# EAGLE board emonDCduo v0.1 (EAGLE 7.5.0)
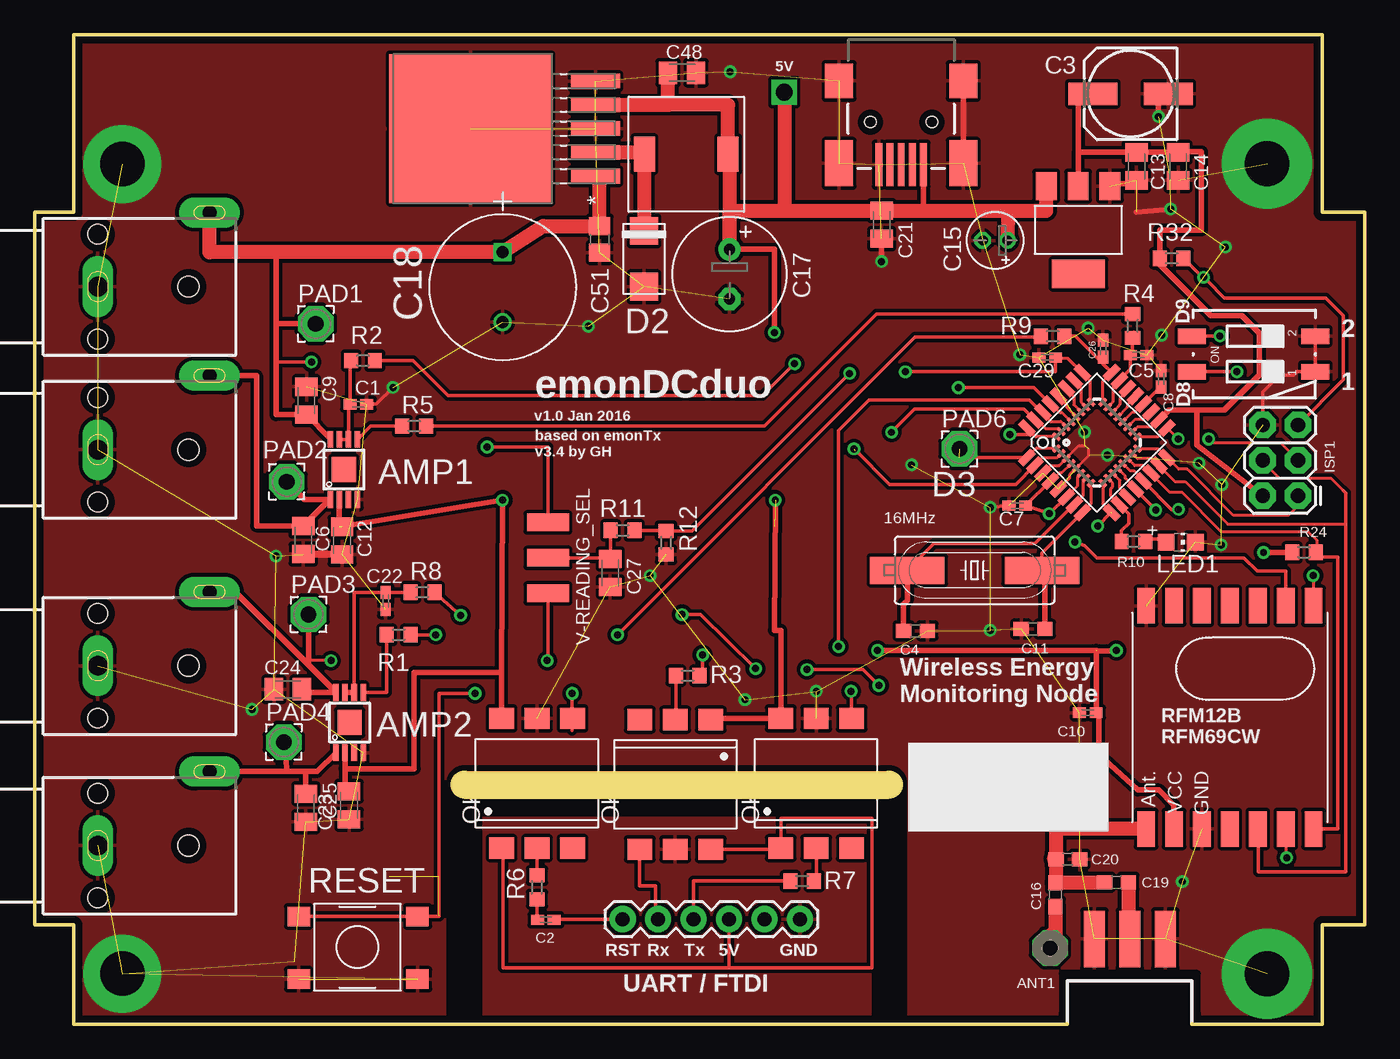
[diagram p0: board, top side]
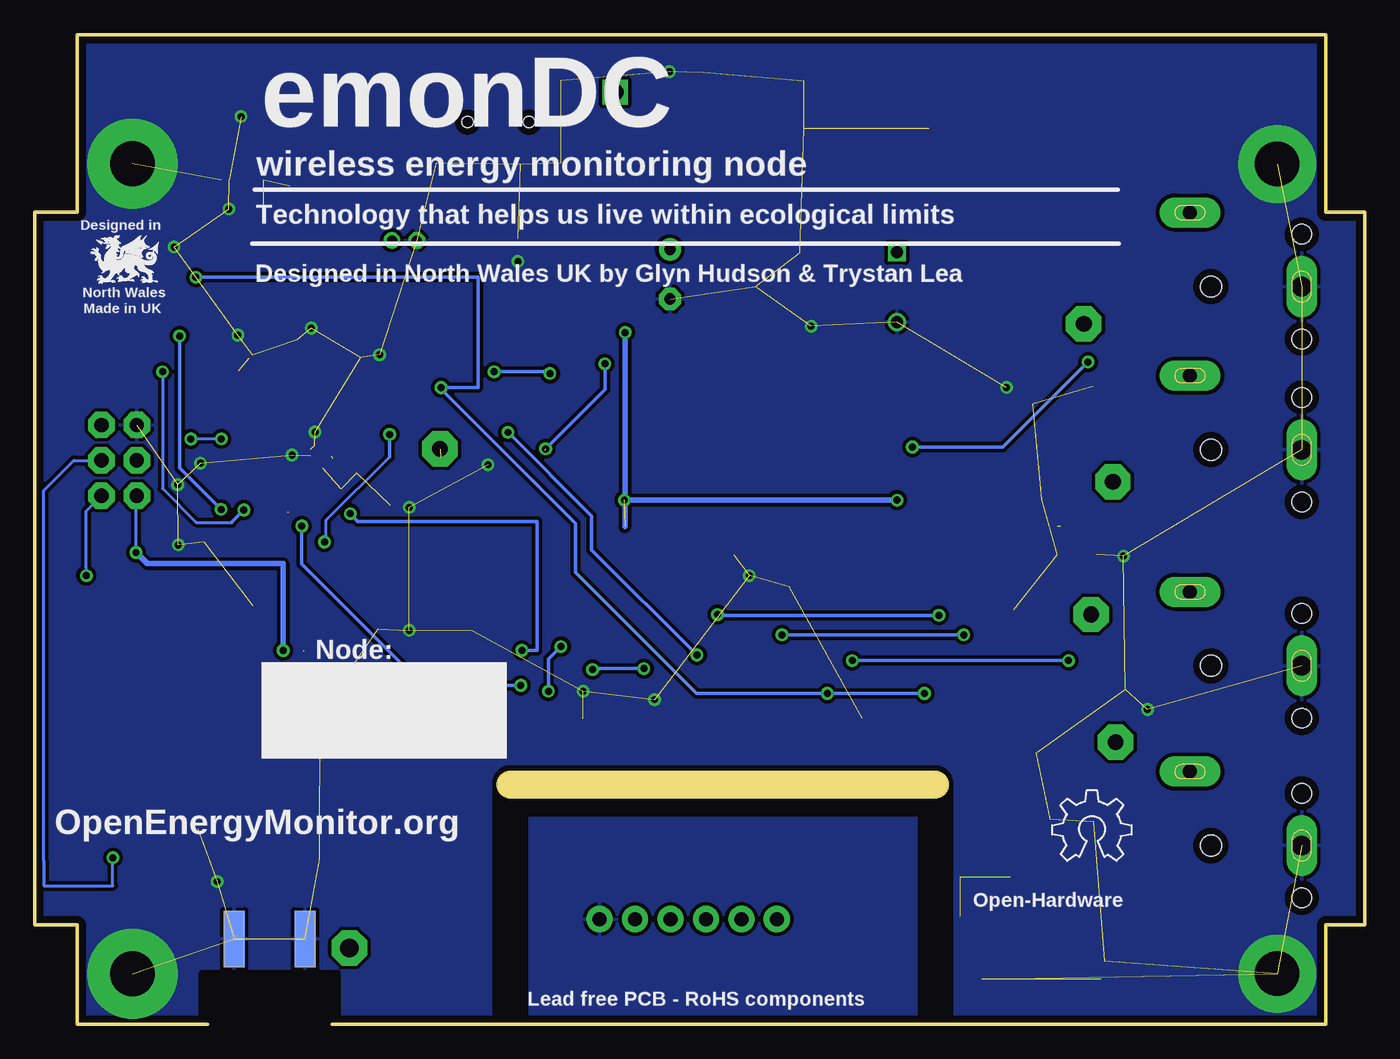
[diagram p1: board, bottom side, seen from below]

Size 95.25 x 70.87 mm. Coordinates in mm from the lower left corner, seen from the top.
Outline: 2.79,0 2.79,7.11 0,7.11 0,58.17 2.79,58.17 2.79,70.87 92.2,70.87 92.2,58.17 95.25,58.17 95.25,7.11 92.2,7.11 92.2,0
Outline: 92.21,0 82.87,0
Outline: 73.97,0 2.79,0
Copper layers (1*16): Top 0.0178mm / dielectric 59mil / Bottom 0.0178mm
Design rules "SSC-EAGLE-2Lyr_v1.0.0.3": minimum track width 6mil, minimum drill 14mil, track to track 6mil, track to pad 6mil, pad to pad 6mil, via to via 6mil, smd to smd 6mil, copper to edge 20mil, drill to drill 16mil, minimum pad ring 8mil, minimum via ring 8mil, stop-mask expansion 3mil, vias tented up to drill 0mil, thermal gap 10mil
Net classes: 2 thin_power: width 0.254 mm
tRestrict: area 73.6,0.8 to 83.3,3.6; 3 lines
bRestrict: area 73.6,0.8 to 83.3,3.6; 3 lines
Milling: 1 lines

## Footprints (pad centres in the part's own frame; a part is rotated, then mirrored left to right if it is on the bottom)
SOT223 = smd 1.499 x 2.007: 1 -2.261,-3.15; 2 0.025,-3.15; 3 2.311,-3.15 | smd 3.81 x 2.007: 4 0,3.15
TO-263 = smd 1.041 x 3.505: 1 -3.404,-8.788; 2 -1.702,-8.788; 3 0,-8.788; 4 1.702,-8.788; 5 3.404,-8.788 | smd 10.668 x 11.659: 6 0,0.152
PAD-01 = drill 1.321 pad 2.54 octagon: 1 0,0
MLF32 = smd 0.7 x 0.3: 1 -2.35,1.75; 2 -2.35,1.25; 3 -2.35,0.75; 4 -2.35,0.25; 5 -2.35,-0.25; 6 -2.35,-0.75; 7 -2.35,-1.25; 8 -2.35,-1.75; 17 2.35,-1.75; 18 2.35,-1.25; 19 2.35,-0.75; 20 2.35,-0.25; 21 2.35,0.25; 22 2.35,0.75; 23 2.35,1.25; 24 2.35,1.75 | smd 0.3 x 0.7: 9 -1.75,-2.35; 10 -1.25,-2.35; 11 -0.75,-2.35; 12 -0.25,-2.35; 13 0.25,-2.35; 14 0.75,-2.35; 15 1.25,-2.35; 16 1.75,-2.35; 25 1.75,2.35; 26 1.25,2.35; 27 0.75,2.35; 28 0.25,2.35; 29 -0.25,2.35; 30 -0.75,2.35; 31 -1.25,2.35; 32 -1.75,2.35
C0402K = smd 0.925 x 0.74: 1 -0.6,0; 2 0.6,0
153CLV-0605 = smd 3.5 x 1.6: + 2.7,0; - -2.7,0
C0603 = smd 1.1 x 1: 1 -0.85,0; 2 0.85,0
C0805K = smd 1.3 x 1.6: 1 -1,0; 2 1,0
E1,8-4 = drill 0.711 pad 1.168: + -0.889,0 | drill 0.711 pad 1.168 octagon: - 0.889,0
E3,5-8 = drill 0.813 pad 1.6: + -1.778,0 | drill 0.813 pad 1.6 octagon: - 1.778,0
CAPPR500-1000X2000 = drill 0.864 square: 1 -5.004,0 | drill 0.864: 2 0,0
C0805 = smd 1.3 x 1.5: 1 -0.95,0; 2 0.95,0
DO-214 = smd 2 x 2: P$1 -2,0; P$2 2,0
SRR0603-331KL = smd 1.5 x 2.5: P$1 -3,0; P$2 3,0
2X3 = drill 1.016 pad 1.88 octagon: 1 0,0; 2 0,2.54; 3 2.54,0; 4 2.54,2.54; 5 5.08,0; 6 5.08,2.54
SMA-EDGE = smd 1.524 x 4.064: GND@0 0,0; GND@1 5.08,0; SIG 2.54,0 | smd 1.524 x 4.064 bottom: GND@2 0,0; GND@3 5.08,0
FTDI_BASIC = drill 1.016 pad 1.88: CTS 10.16,0; DTR 0,0; GND 12.7,0; RXI 2.54,0; TXO 5.08,0; VCC 7.62,0
CHIP-LED0805 = smd 1.2 x 1.2: A 0,-1.05; C 0,1.05
S-PDSO-G08 = smd 0.4 x 1.2: 1 -0.975,-2.157; 2 -0.325,-2.157; 3 0.325,-2.157; 4 0.975,-2.157; 5 0.975,2.157; 6 0.325,2.157; 7 -0.325,2.157; 8 -0.975,2.157 | smd 1.73 x 1.78: TH 0,0
DIL6-SMD = smd 1.78 x 1.52: 1 -2.54,-4.645; 2 0,-4.645; 3 2.54,-4.645; 4 2.54,4.645; 5 0,4.645; 6 -2.54,4.645
2,54/1,1 = drill 1.118 pad 2.54 octagon: 1 0,0
HC49UP = smd 5.334 x 1.93: 1 -4.826,0; 2 4.826,0
R0603 = smd 1 x 1.1: 1 -0.85,0; 2 0.85,0
RFM12B = smd 2.54 x 1.27: ANT 8,-6; FFS -8,2; GND 8,-2; IRQ -8,4; P$8 -8,0; P$9 -8,-2; P$10 -8,-4; P$12 -8,-6; P$16 8,0; SCK 8,4; SDI 8,2; SDO -8,6; SEL 8,6; VDD 8,-4
DIP_SWITCH_SMT = smd 1.1 x 2: 1 -1.27,-4.215; 2 1.27,-4.215; 3 1.27,4.615; 4 -1.27,4.615
TQFP32-08 = smd 1.27 x 0.559: 1 -4.293,2.8; 2 -4.293,2; 3 -4.293,1.2; 4 -4.293,0.4; 5 -4.293,-0.4; 6 -4.293,-1.2; 7 -4.293,-2; 8 -4.293,-2.8; 17 4.293,-2.8; 18 4.293,-2; 19 4.293,-1.2; 20 4.293,-0.4; 21 4.293,0.4; 22 4.293,1.2; 23 4.293,2; 24 4.293,2.8 | smd 0.559 x 1.27: 9 -2.8,-4.293; 10 -2,-4.293; 11 -1.2,-4.293; 12 -0.4,-4.293; 13 0.4,-4.293; 14 1.2,-4.293; 15 2,-4.293; 16 2.8,-4.293; 25 2.8,4.293; 26 2,4.293; 27 1.2,4.293; 28 0.4,4.293; 29 -0.4,4.293; 30 -1.2,4.293; 31 -2,4.293; 32 -2.8,4.293
SWITCH_TACT_MULTICOMP = smd 1.6 x 1.4: P$1 -1.1,5.3; P$2 7.4,5.3; P$3 -1.1,0.8; P$4 7.4,0.8
USB-MINIB-CISECO = smd 3.1 x 0.5: D+ 8.25,0; D- 8.25,0.8; GND 8.25,-1.6; ID 8.25,-0.8; VBUS 8.25,1.6 | smd 2.5 x 2: MTN1 2.25,4.45; MTN3 2.25,-4.45 | smd 3.3 x 2: MTN2 8.15,4.45; MTN4 8.15,-4.45 | hole 0.8: 5.2,2.2; 5.2,-2.2
1X03_SMD_RA_FEMALE_NOWRITE = smd 1.25 x 3: 1 -2.54,3.415; 2 0,3.415; 3 2.54,3.415
WBTOR1 = drill 1.4 pad 2.2 long: S 0,-4 | drill 1 pad 2.2 long: T 5.3,-12 | hole 1.4: -3.75,-4; 3.75,-4 | hole 1.5: 0,-10.5

## Placement (x,y rotation side)
3.3V_REG  REG1117  [SOT223]  74.76,56.9 180 top
5V_REG  TL2575HV  [TO-263]  31.36,64.15 90 top
ANT1  [PAD-01]  72.72,5.46 0 top
ATMEGA328  ATMEGA168MLF  [MLF32]  76.07,41.66 45 top
C1  0.22uF 6.3V  [C0402K]  23.17,44.41 0 top
C2  100nF  [C0402K]  36.59,7.47 180 top
C3  100uF  [153CLV-0605]  78.49,66.65 180 top
C4  22pF  [C0603]  63.08,28.17 0 top
C5  100nF  [C0402K]  79.06,47.93 180 top
C6  100nF 100V  [C0805K]  19.23,34.68 270 top
C7  100nF  [C0402K]  70.37,37.15 180 top
C8  100nF  [C0402K]  80.67,46.23 90 top
C9  100nF 100V  [C0805K]  19.45,44.66 270 top
C10  100nF  [C0402K]  75.42,22.31 180 top
C11  22pF  [C0603]  71.5,28.31 180 top
C12  100nF 100V  [C0805K]  22,34.63 90 top
C13  0.1uF  [C0805K]  78.91,61.45 270 top
C14  0.1uF  [C0805K]  81.89,61.45 270 top
C15  10uF 35v  [E1,8-4]  68.79,56.14 180 top
C16  22pF  [C0603]  73.1,9.27 270 top
C17  470uF 16V  [E3,5-8]  49.76,53.72 270 top
C18  330UF 63V  [CAPPR500-1000X2000]  33.51,50.29 270 top
C19  22pF  [C0603]  77.47,10.16 0 top
C20  tune  [C0603]  73.99,11.81 0 top
C21  0.1uF  [C0805K]  60.66,57.27 270 top
C22  0.22uF 6.3V  [C0402K]  25.13,30.31 270 top
C23  100nF 100V  [C0805K]  19.41,15.5 270 top
C24  100nF 100V  [C0805K]  18.12,23.98 0 top
C25  100nF 100V  [C0805K]  22.5,15.68 90 top
C26  100nF  [C0402K]  76.52,48.39 270 top
C27  100nF 100V  [C0805K]  41.21,32.32 270 top
C29  100nF  [C0402K]  72.52,47.75 180 top
C48  0.1uF  [C0805K]  46.35,68.15 0 top
C51  0.1uF  [C0805]  40.45,56.22 270 top
D2  MBRA130LT3G  [DO-214]  43.63,54.82 270 top
I1  [SRR0603-331KL]  46.66,62.32 0 top
ISP1  M20-9980346  [2X3]  90.49,37.85 90 top
J$1  SMA_EDGE  [SMA-EDGE]  80.98,6.1 180 top
JP-UART  2211S-06G  [FTDI_BASIC]  42.1,7.52 0 top
LED1  Red 1.85V  [CHIP-LED0805]  82.08,34.52 270 top
LMP2  LMP8481SMCLMP8481  [S-PDSO-G08]  22.54,21.6 0 top
LMP8481  LMP8481SMCLMP8481  [S-PDSO-G08]  22.13,39.73 0 top
LOGO1  OSHW_LOGO_6MILX0200-NT  [OSHW_6X200_NOTEXT]  22.37,11.68 0 bottom
OK1  H11L1MS  [DIL6-SMD]  55.97,17.25 0 top
OK2  H11L1MS  [DIL6-SMD]  45.87,17.17 180 top
OK3  H11L1MS  [DIL6-SMD]  35.97,17.25 0 top
PAD1  WIREPAD2,54/1,1  [2,54/1,1]  20.11,50.17 0 top
PAD2  WIREPAD2,54/1,1  [2,54/1,1]  18.03,38.86 0 top
PAD3  WIREPAD2,54/1,1  [2,54/1,1]  19.6,29.35 0 top
PAD4  WIREPAD2,54/1,1  [2,54/1,1]  17.83,20.2 0 top
PAD6  WIREPAD2,54/1,1  [2,54/1,1]  66.23,41.21 0 top
Q1  16Mhz XT49M-2016M  [HC49UP]  67.31,32.51 180 top
R1  1K  [R0603]  26.06,27.89 0 top
R2  3.9K  [R0603]  23.5,47.53 0 top
R3  348R  [R0603]  46.76,24.96 0 top
R4  9K1  [R0603]  78.62,50.01 90 top
R5  1K  [R0603]  27.17,42.84 0 top
R6  348R  [R0603]  35.97,9.8 90 top
R7  348R  [R0603]  54.97,10.25 0 top
R8  3.9K  [R0603]  27.77,30.94 0 top
R9  9K1  [R0603]  72.9,49.28 180 top
R10  1K  [R0603]  78.69,34.57 180 top
R11  120K  [R0603]  42.1,35.37 180 top
R12  9K1  [R0603]  45.21,34.48 90 top
R24  120K  [R0603]  90.92,33.8 180 top
R32  10K  [R0603]  81.42,54.86 180 top
RF  RFM12B  [RFM12B]  85.6,21.97 270 top
S3  A6S-2104-PH  [DIP_SWITCH_SMT]  87.5,48.01 90 top
U1_TQFP  ATMEGA328P  [TQFP32-08]  76.07,41.66 45 top
U$1  MC32882  [SWITCH_TACT_MULTICOMP]  20,2.41 0 top
USB  MUSB-05-S-B-SM-A  [USB-MINIB-CISECO]  62.05,69.82 270 top
V-READING_SEL  M20-9990346  [1X03_SMD_RA_FEMALE_NOWRITE]  33.34,33.4 270 top
X1  PSG01540  [WBTOR1]  0.51,52.83 90 top
X2  PSG01540  [WBTOR1]  0.51,41.15 90 top
X3  PSG01540  [WBTOR1]  0.51,12.79 90 top
X4  PSG01540  [WBTOR1]  0.51,25.67 90 top

## Library data of the parts
3.3V_REG = burr-brown; MF: TEXAS INSTRUMENTS; MPN: REG1117; OC_FARNELL: 1097566; OC_NEWARK: 14P6981
5V_REG = TL2575HV; MF: TEXAS INSTRUMENTS; MPN: LM2575HVS-15/NOPB; OC_FARNELL: 2492609
ANT1 = discrete; OC_FARNELL: unknown
ATMEGA328 = SparkFun-DigitalIC; MF: ATMEL; MPN: ATMEGA168-20MU; OC_FARNELL: 1455105
C1 C22 = rcl; MF: AVX; MPN: 04026D224KAT2A; OC_FARNELL: 1327659
C2 C5 C7 C8 C10 C26 C29 = rcl; MF: WALSIN; MPN: 0402X104K100CT; OC_FARNELL: 2496809
C3 = resistor; MF: NICHICON; MPN: UWX0J101MCL1GB; OC_FARNELL: 1823603
C4 C11 = resistor; MF: YAGEO (PHYCOMP); MPN: CC0402JRNPO9BN470; OC_FARNELL: 3019202
C6 C9 C12 C23-C25 C27 = rcl; MF: AVX; MPN: 08051C104K4Z2A; OC_FARNELL: 1833851
C13 C14 C21 C48 = rcl; MF: WALSIN; MPN: 0805B104K160CT; OC_FARNELL: 2496942
C15 = rcl; MF: AVX; MPN: TAJD106K035RNJ; OC_FARNELL: 498956
C16 C19 = rcl; MF: YAGEO (PHYCOMP); MPN: CC0402JRNPO9BN470; OC_FARNELL: 3019202
C17 = rcl; MF: RUBYCON; MPN: 16YXF470MEFC10X12.5; OC_FARNELL: 1144616
C18 = Panasonic-ECA_01; MF: PANASONIC ELECTRONIC COMPONENTS; MPN: ECA1JHG331; OC_FARNELL: unknown; OC_NEWARK: 96K9187; PACKAGE: Radial Lead-TH; SUPPLIER: PANASONIC; TOLERANCE: ±20 %; VOLTAGERATING: 63V
C20 = rcl; OC_FARNELL: unknown
C51 = resistor; MF: WALSIN; MPN: 0805B104K160CT; OC_FARNELL: 2496942
D2 = CASE 403D Diode; MF: ON SEMICONDUCTOR; MPN: MBRA130LT3G; OC_FARNELL: 9555978
I1 = SRR0603-331KL; INDUCTANCE: 330uH; MF: BOURNS; MPN: SRR0603-331KL; OC_FARNELL: 2333890
ISP1 = SparkFun; MF: HARWIN; MPN: M20-9980346; OC_FARNELL: 1022231
J$1 = SparkFun-Connectors; OC_FARNELL: unknown
JP-UART = SparkFun; MF: MULTICOMP; MPN: 2211S-06G; OC_FARNELL: 1593415
LED1 = adafruit; MF: ROHM; MPN: SML-211UTT86K; OC_FARNELL: 1685056
LMP2 LMP8481 = lmp8481b; MF: TEXAS INSTRUMENTS; MPN: LMP8481MME-S/NOPB; OC_FARNELL: 2322044
LOGO1 = ohw-logo; OC_FARNELL: unknown
OK1-OK3 = optocoupler; OC_FARNELL: unknown; OC_NEWARK: unknown
PAD1-PAD4 PAD6 = wirepad
Q1 = adafruit; MF: VISHAY; MPN: XT49M-2016M; OC_FARNELL: 1469641; OC_NEWARK: unknown
R1 R5 = adafruit; MF: MULTICOMP; MPN: MC0063W060351K; OC_FARNELL: 9331697
R2 R8 = adafruit; MF: VISHAY; MPN: CRCW06039K09FKEA; OC_FARNELL: 1152155
R3 R6 R7 = adafruit; MF: MULTICOMP; MPN: MC0063W06031348R; OC_FARNELL: 1170742
R4 R9 R11 R12 = adafruit; MF: MULTICOMP; MPN: MC01W080559K1; OC_FARNELL: 9334955
R10 = rcl; MF: MULTICOMP; MPN: MC0063W060351K; OC_FARNELL: 9331697
R24 = rcl; MF: YAGEO (PHYCOMP); MPN: RC0603FR-07120KL; OC_FARNELL: 9238735
R32 = adafruit; MF: MULTICOMP; MPN: MC0063W0603510K; OC_FARNELL: 9331700
RF = JeeParts; OC_FARNELL: unknown
S3 = OpenEnergyMonitor; MF: OMRON ELECTRONIC COMPONENTS; MPN: A6S2104H; OC_FARNELL: 1960894
U1_TQFP = SparkFun-DigitalIC; MF: ATMEL; MPN: ATMEGA328-AU; OC_FARNELL: 1972086; PROD_ID: IC-09069
U$1 = multicomp tact switch
USB = Ciseco USB miniB; MF: MOLEX; MPN: 67503-1020; OC_FARNELL: 1125348
V-READING_SEL = SparkFun-Connectors; MF: HARWIN; MPN: M20-9990346; OC_FARNELL: 1022249
X1-X4 = con-lumberg; MF: PRO SIGNAL; MPN: PSG01540; OC_FARNELL: 1280698; OC_NEWARK: 98K2588

## Nets
3.3V: 3.3V_REG.2 ATMEGA328.4 ATMEGA328.6 ATMEGA328.18 C3.+ C7.1 C10.1 C13.1 C14.1 ISP1.2 R24.2 R32.2 RF.VDD U1_TQFP.4 U1_TQFP.6 U1_TQFP.18
5V [power]: 3.3V_REG.3 5V_REG.4 C12.2 C15.+ C17.+ C21.1 C25.2 C48.1 I1.P$2 LMP2.2 LMP8481.2 OK1.6 OK2.1 OK3.6 USB.VBUS
+5V-ISO [power]: JP-UART.VCC OK1.1 OK2.6 OK3.1
A6: ATMEGA328.19 U1_TQFP.19
A7: ATMEGA328.22 U1_TQFP.22
ACD2: ATMEGA328.25 C29.1 R11.1 R12.2 U1_TQFP.25
ADC0A: R4.2 R5.2
ADC1A: R1.2 R9.2
ADC1AYEA: ATMEGA328.24 C26.2 R9.1 U1_TQFP.24
ADC4: ATMEGA328.26 U1_TQFP.26
ADC5: ATMEGA328.28 U1_TQFP.28
AGND [thin_power]: ATMEGA328.21 U1_TQFP.21
D0/RX: ATMEGA328.30 OK1.4 U1_TQFP.30
D1/TX: ATMEGA328.31 R3.2 U1_TQFP.31
D2: ATMEGA328.32 RF.IRQ U1_TQFP.32
D3: ATMEGA328.1 PAD6.1 U1_TQFP.1
D4/PWM0: ATMEGA328.2 R2.2 U1_TQFP.2
D5/PWM1: ATMEGA328.9 R8.2 U1_TQFP.9
D6: ATMEGA328.10 R10.2 U1_TQFP.10
D7: ATMEGA328.11 U1_TQFP.11
D8: ATMEGA328.12 S3.4 U1_TQFP.12
D9: ATMEGA328.13 S3.3 U1_TQFP.13
D10: ATMEGA328.14 R24.1 RF.SEL U1_TQFP.14
D11/MOSI: ATMEGA328.15 ISP1.4 RF.SDI U1_TQFP.15
D12/MISO: ATMEGA328.16 ISP1.1 RF.SDO U1_TQFP.16
D13/SCK: ATMEGA328.17 ISP1.3 RF.SCK U1_TQFP.17
DIG1: C16.1 C19.1 C20.1 RF.ANT
GND [thin_power]: 3.3V_REG.1 5V_REG.3 5V_REG.5 5V_REG.6 ATMEGA328.3 ATMEGA328.5 C1.2 C3.- C4.2 C5.1 C6.2 C7.2 C8.2 C9.1 C10.2 C11.2 C12.1 C13.2 C14.2 C15.- C17.- C18.2 C20.2 C21.2 C22.2 C23.2 C24.1 C25.1 C26.1 C27.2 C29.2 C48.2 C51.2 D2.P$2 ISP1.6 J$1.GND@0 J$1.GND@1 J$1.GND@2 J$1.GND@3 LED1.C LMP2.4 LMP8481.4 OK1.5 OK3.5 R12.1 RF.GND RF.P$12 S3.1 S3.2 U1_TQFP.3 U1_TQFP.5 U$1.P$3 U$1.P$4 USB.GND USB.MTN1 USB.MTN2 USB.MTN3 USB.MTN4 X1.S X2.S X3.S X4.S
GND-ISO [thin_power]: JP-UART.GND OK2.5
IND: 5V_REG.2 D2.P$1 I1.P$1
INPUTLINE1: 5V_REG.1 C9.2 C18.1 C51.1 LMP8481.8 PAD1.1 V-READING_SEL.1 X1.T
INPUTLINE2: C24.2 LMP2.8 PAD3.1 V-READING_SEL.3 X4.T
N$1: ATMEGA328.7 C4.1 Q1.2 U1_TQFP.7
N$2: ATMEGA328.23 C5.2 R4.1 U1_TQFP.23
N$3: LMP2.5 R1.1
N$5: ATMEGA328.27 U1_TQFP.27
N$6: LMP8481.5 R5.1
N$9: ATMEGA328.8 C11.1 Q1.1 U1_TQFP.8
N$10: C2.1 JP-UART.DTR
N$11: ANT1.1 C16.2
N$13: OK1.2 R7.2
N$15: OK2.2 R3.1
N$17: OK3.2 R6.2
N$20: ATMEGA328.20 C8.1 U1_TQFP.20
N$24: C19.2 J$1.SIG
N$41: LED1.A R10.1
NETDF: C22.1 LMP2.6 LMP2.7 R8.1
NETDG: C1.1 LMP8481.6 LMP8481.7 R2.1
RESET: ATMEGA328.29 ISP1.5 OK3.4 R32.1 U1_TQFP.29 U$1.P$1 U$1.P$2
RESET-ISO: C2.2 R6.1
RX-ISO: JP-UART.RXI OK2.4
TOLOAD1: C6.1 LMP8481.1 PAD2.1 X2.T
TOLOAD2: C23.1 LMP2.1 PAD4.1 X3.T
TX-ISO: JP-UART.TXO R7.1
VSEL: C27.1 R11.2 V-READING_SEL.2

## Tracks (layer width: path | path; a pad name or v marks a point on that pad's centre or on a via)
3.3V  (via drill 0.5)  (2 unrouted)
  Top 0.203: 88.03,33.8 v88.01,33.78 | U1_TQFP.4 72.81,38.9 73.41,39.5 73.56,39.5 ATMEGA328.4 | ATMEGA328.18 78.63,42.43 78.99,42.8 80.04,42.8 U1_TQFP.18 | ATMEGA328.6 74.68,39.19 74.68,38.56 U1_TQFP.6
  Top 0.254: U1_TQFP.4 C7.1 v72.66,36.57 U1_TQFP.6 | R32.2 80.57,54.39 | 81.22,44 81.22,43.97 | v77.47,26.77 77.47,26.75
  Top 0.406: RF.VDD 81.6,15.68 80.52,16.76 78.99,16.76 76.2,19.3 76.2,22.12 C10.1 76.02,26.77 v60.37,26.77 | R24.2 88.03,33.8 | 73.89,37.82 U1_TQFP.6 | 80.57,54.39 84.22,50.75 86.47,50.75 87.72,49.5 87.72,46.5 85.22,44 83.22,44 | 83.22,44 81.22,44 | 81.22,43.97 U1_TQFP.18 | 3.3V_REG.2 74.73,62.45 | 74.73,62.45 C13.1 C14.1 81.39,62.5 83.56,62.5 83.57,56.9 80.57,56.9 R32.2 | C3.+ 74.73,66.65 74.73,62.45 | ISP1.2 83.22,41.5 83.22,44 | 77.47,26.75 76,26.75
  Bottom 0.203: v88.01,33.78 88.01,37.78 ISP1.2
  Bottom 0.254: v72.66,36.57 72.14,36.02 59.27,36.02 59.27,26.77 v60.37,26.77
  Bottom 0.406: 87.99,33.78 87.2,33 77.47,33 v77.47,26.77
5V  (via drill 0.5, 1.2)  (2 unrouted)
  Top 0.406: USB.VBUS 63.65,58.27 64.01,58.27 | C17.+ 52.97,55.5 v52.97,49.56 | v53.03,37.54 52.97,28.21 53.43,28.21 OK1.6 48.48,21.88 | LMP8481.2 21.81,35.63 | C12.2 v33.49,37.54 33.43,25.21 | OK3.6 33.43,25.21 | C25.2 22.21,16.96 LMP2.2 22.21,18.29 27.18,18.29 27.18,25.21 33.43,25.21
  Top 0.5: 48.48,21.88 OK2.1
  Top 1.016: 5V_REG.4 45.36,65.85 | 45.36,65.85 C48.1 | 45.36,65.85 49.66,65.85 I1.P$2 49.76,62.32 C17.+ 49.76,58.27 53.68,58.27 | 53.68,58.27 C21.1 64.01,58.27 69.7,58.27 | 69.7,58.27 C15.+ | 69.7,58.27 72.44,58.27 3.3V_REG.3 | v53.68,66.76 53.68,58.27
  Bottom 0.406: v52.97,49.56 52.98,35.64 | v53.03,37.54 v33.49,37.54
+5V-ISO
  Top 0.254: JP-UART.VCC 49.72,4.02 | 49.72,4.02 33.53,4.02 33.53,12.61 OK3.1 | 49.72,4.02 59.94,4.02 59.94,14.73 53.43,14.73 OK1.1 53.43,12.54 OK2.6
A6
  Top 0.203: U1_TQFP.19 79.91,43.84 79.38,43.31 78.78,43.31 ATMEGA328.19
A7
  Top 0.203: U1_TQFP.22 78.26,45.37 77.72,44.83 77.71,44.37 77.61,44.24 77.6,44.24 ATMEGA328.22
ACD2  (via drill 0.5)
  Top 0.203: U1_TQFP.25 75.02,46.65 75.56,46.1 75.56,44.64 ATMEGA328.25
  Top 0.254: R11.1 45.21,35.37 R12.2 47.08,35.33 v58.36,46.61 | U1_TQFP.25 74,47.69 C29.1 73.12,46.74 v62.36,46.74
  Bottom 0.254: v62.36,46.74 58.48,46.74 v58.36,46.61
ADC0A
  Top 0.254: R5.2 52.26,42.84 60.28,50.86 R4.2
ADC1A  (via drill 0.5)
  Top 0.254: v41.73,27.89 63.06,49.21 71.98,49.21 | v28.71,27.89 R1.2
  Top 0.406: 71.98,49.21 R9.2
  Bottom 0.254: v41.73,27.89 v28.71,27.89
ADC1AYEA
  Top 0.203: ATMEGA328.24 76.5,46.04 U1_TQFP.24
  Top 0.254: R9.1 74.52,49.28 U1_TQFP.24 76.52,47.28 C26.2
ADC4
  Top 0.203: U1_TQFP.26 74.45,46.07 74.93,45.59 74.93,44.57 ATMEGA328.26
ADC5
  Top 0.203: U1_TQFP.28 73.32,44.92 73.91,44.32 73.91,44.17 ATMEGA328.28
AGND
  Top 0.203: U1_TQFP.21 78.78,44.94 78.3,44.41 78.23,44.17 ATMEGA328.21
D0/RX  (via drill 0.5)
  Top 0.203: U1_TQFP.30 72.19,43.76 72.77,43.18 73.49,43.18 ATMEGA328.30
  Top 0.254: 72.77,43.18 71.26,44.7 59.75,44.7 57.57,42.52 v57.57,27.05 | v58.47,23.85 58.51,23.81 OK1.4
  Bottom 0.254: v57.57,27.05 58.47,26.15 v58.47,23.85
D1/TX  (via drill 0.5)
  Top 0.203: U1_TQFP.31 71.78,43.28 72.39,42.67 73.29,42.67 ATMEGA328.31
  Top 0.254: v61.37,42.4 63.02,44.05 70.86,44.05 U1_TQFP.31 71.54,43.33 | v47.83,26.44 47.83,25.18 R3.2
  Bottom 0.254: v61.37,42.4 55.37,36.4 55.37,33.98 v47.83,26.44
D2  (via drill 0.5)
  Top 0.203: ATMEGA328.32 71.69,42.08 U1_TQFP.32
  Top 0.254: RF.IRQ 89.6,32.45 87.57,32.45 86.61,33.4 76.07,33.4 75.18,34.29 v74.51,34.54 | 71.69,42.08 71.52,42.25 v69.84,42.25
  Bottom 0.203: 74.3,34.54 v74.51,34.54 74.42,34.42 74.42,36.07 69.85,40.64
  Bottom 0.254: v69.84,42.25 69.85,41.87 69.85,40.64
D3  (1 unrouted)
  Top 0.203: U1_TQFP.1 71.08,40.6 71.76,41.28 73.13,41.28 ATMEGA328.1
  Top 0.254: U1_TQFP.1 66.21,40.6
D4/PWM0  (via drill 0.5)  (1 unrouted)
  Top 0.203: U1_TQFP.2 71.62,40.08 72.14,40.59 73.24,40.59 ATMEGA328.2
  Top 0.254: U1_TQFP.2 70.26,38.67 61.21,38.67 58.8,41.09 58.74,41.09 | v54.42,47.31 52.13,45.02 29.59,45.02 27.08,47.53 R2.2
  Bottom 0.254: v58.67,41.21 54.42,45.47 v54.42,47.31
D5/PWM1  (via drill 0.5)  (1 unrouted)
  Top 0.203: ATMEGA328.9 76.5,37.27 U1_TQFP.9
  Top 0.254: v30.49,29.29 R8.2 | v76.14,35.69 77.09,36.64 | v60.45,24.26 59.31,25.4 v55.31,25.4 | v51.62,25.46 47.69,29.34 v46.36,29.34
  Bottom 0.254: v76.14,35.69 76.14,32.96 67.44,24.26 v60.45,24.26 | v55.31,25.4 55.25,25.46 v51.62,25.46 | v46.36,29.34 46.41,29.29 v30.49,29.29
D6
  Top 0.203: U1_TQFP.10 77.69,37.24 77.09,37.85 77.09,38.35 77.22,38.48 77.22,38.75 ATMEGA328.10
  Top 0.254: U1_TQFP.10 78.37,36.53 78.37,35.87 77.84,35.35 R10.2
D7
  Top 0.203: U1_TQFP.11 78.26,37.82 77.72,38.35 77.72,38.94 ATMEGA328.11
D8  (via drill 0.5)
  Top 0.203: U1_TQFP.12 78.83,38.4 78.11,39.12 78.11,39.27 ATMEGA328.12
  Top 0.254: S3.4 v86.11,46.74 | U1_TQFP.12 78.83,38.29 v80.29,36.83
  Bottom 0.203: v86.11,46.74 86.11,38.35 83.69,35.94 81.15,35.94
  Bottom 0.254: v80.29,36.83 81.15,35.97 81.15,35.94
D9  (via drill 0.5)
  Top 0.203: U1_TQFP.13 79.39,38.97 78.74,39.62 78.46,39.62 ATMEGA328.13
  Top 0.254: S3.3 82.91,49.3 v84.89,49.3 | v81.92,36.88 81.41,36.88 U1_TQFP.13
  Bottom 0.254: v81.92,36.88 84.89,39.85 v84.89,49.3
D10
  Top 0.203: 91.77,33.45 R24.1 91.82,33.85 91.82,34.67 91.19,35.31 84.96,35.31 82.17,38.1 81.28,38.1 79.96,39.42 U1_TQFP.14 79.91,39.47 79.38,40.01 78.78,40.01 ATMEGA328.14
  Top 0.254: RF.SEL 93.34,13.97 93.34,33.45 91.77,33.45
D11/MOSI
  Top 0.203: ISP1.4 87.95,40.32 89.15,39.12 92.84,39.12 93.73,38.23 | 87.59,13.32 RF.SDI | ATMEGA328.15 78.98,40.51 80.01,40.51 80.49,40.04 U1_TQFP.15 80.52,40 81.66,38.86 82.4,38.86 85.45,35.81 93.9,35.81
  Top 0.254: 87.59,13.32 87.63,13.32 87.63,10.92 93.9,10.92 93.9,35.81 93.9,38.05 93.73,38.23
D12/MISO  (via drill 0.5)
  Top 0.203: RF.SDO 91.6,32.1 v91.57,32.13 | ISP1.1 90.49,37.15 89.79,36.45 85.85,36.45 82.55,39.75 81.94,39.75 U1_TQFP.16 80.46,41.23 ATMEGA328.16
  Bottom 0.203: v91.57,32.13 91.57,36.77 ISP1.1
D13/SCK  (via drill 0.5)
  Top 0.203: RF.SCK 89.6,12.23 v89.66,11.92 | v81.89,41.92 81.11,42.71 U1_TQFP.17 80.46,42.08 ATMEGA328.17 | v84.08,41.92 84.2,41.66 84.14,41.67 89.22,41.66 ISP1.3
  Bottom 0.203: ISP1.3 92.46,40.39 94.62,38.23 94.62,11.68 94.62,9.91 89.66,9.91 v89.66,11.92 | v81.89,41.92 v84.08,41.92
DIG1
  Top 1.016: RF.ANT 73.14,13.97 C20.1 73.14,10.12 C16.1 73.1,10.16 C19.1
  Top 1.143: C20.1 arc-90 73.07,11.88
GND  (via drill 0.5, 3.2 pad 5.59, 3.2 pad 6.45)  (85 unrouted)
  Top 0.203: 74,40.66 74.79,41.45 75.21,41.45 | 74.61,39.85 75.49,40.73 75.49,41.19
  Top 0.254: ISP1.6 87.95,45.28 89.15,46.48 90.17,46.48 90.42,46.74 S3.1 S3.2 | 79.92,47.7 C5.1 | C7.2 v68.43,37.02 | C1.2 24.45,44.41 v25.65,45.61
  Top 0.406: USB.MTN1 USB.MTN2 | C21.2 v60.66,54.63 | C3.- 80.48,66.65 v80.48,65.02 | 78.91,58.16 v81.36,58.39 | 81.34,60.45 C14.2
  Top 0.5: C12.1 19.23,33.63 C6.2
  other vias: 76.84,40.77 75.18,42.42 55.97,23.85 6.27,61.62 39.65,50 80.72,49.35 68.44,28.21 88.26,61.64 50.86,23.24 82.19,10.21 49.81,68.23 17.27,33.53 84.98,34.34 83.39,40.19 85.03,38.65 85.28,55.68 6.27,3.61 88.26,3.61 15.55,22.55 75.45,49.86 62.8,40.07 70.56,47.96 44.07,32.13
  pour Bottom (isolate 0.254): 3.05,70.61 3.05,57.91 0.25,57.91 0.25,7.37 3.05,7.37 3.05,0.25 91.95,0.25 91.95,7.37 95,7.37 95,57.91 91.95,57.91 91.95,70.61
  pour Top (isolate 0.254): 3.05,70.61 3.05,57.91 0.25,57.91 0.25,7.37 3.05,7.37 3.05,0.25 91.95,0.25 91.95,7.37 95,7.37 95,57.91 91.95,57.91 91.95,70.61
GND-ISO
  pour Top (isolate 0.254): 31.75,14.73 60.2,14.73 60.2,0.25 31.75,0.25
  pour Bottom (isolate 0.254): 31.74,14.72 60.07,14.74 60.2,0.31 31.75,0.31
IND
  Top 1.016: 43.41,62.6 I1.P$1 | 5V_REG.2 43.66,62.45 I1.P$1 | I1.P$1 43.63,62.32 D2.P$1
INPUTLINE1  (via drill 0.5)
  Top 0.254: V-READING_SEL.1 36.75,41.34 v32.39,41.34 | v19.81,47.43 17.27,47.43
  Top 0.406: LMP8481.8 21.16,41.95 C9.2 17.27,43.66 17.27,47.43 17.27,48.01 17.27,50.17 | 17.27,50.17 17.27,55.3 | PAD1.1 17.27,50.17
  Top 1.016: 5V_REG.1 40.45,60.75 C51.1 36.4,57.18 C18.1 17.27,55.3 12.51,55.3 X1.T
  Bottom 0.254: v32.39,41.34 25.91,41.34 v19.81,47.43
INPUTLINE2  (via drill 0.5)
  Top 0.254: V-READING_SEL.3 36.75,25.97 | v21.21,26.04 19.79,26.1 19.6,25.91
  Top 0.406: X4.T 14.36,30.97 19.6,25.72 | 19.6,25.72 LMP2.8 19.06,23.76 C24.2 | PAD3.1 19.6,25.91 19.6,25.72 | 36.75,25.97 v36.7,26.04
  Bottom 0.254: v36.7,26.04 v21.21,26.04
N$1
  Top 0.203: ATMEGA328.7 75.08,38.89 75.08,37.84 U1_TQFP.7
  Top 0.254: U1_TQFP.7 74.42,37.21 71.63,34.42 64.39,34.42 Q1.2
  Top 0.406: Q1.2 62.48,30.35 62.23,30.1 62.23,29.25 C4.1
N$2
  Top 0.203: U1_TQFP.23 77.69,46.07 77.22,45.59 77.22,44.57 ATMEGA328.23
  Top 0.254: 78.72,49.57 R4.1 78.62,48.09 C5.2 78.46,46.92 77.69,46.15 U1_TQFP.23
N$3
  Top 0.254: R1.1 25.21,23.76 LMP2.5
N$5
  Top 0.203: U1_TQFP.27 73.89,45.49 74.42,44.96 74.42,44.37 ATMEGA328.27
N$6
  Top 0.254: LMP8481.5 24.06,42.84 R5.1
N$8
  Top 0.203: 72.52,39.78 72.77,40.03 73.37,40.03 73.83,40.49 73.85,40.49
N$9
  Top 0.203: ATMEGA328.8 75.65,37.27 U1_TQFP.8
  Top 0.254: Q1.1 72.14,33.76 U1_TQFP.8
  Top 0.406: C11.1 72.35,32.3 Q1.1
N$10
  Top 0.254: C2.1 37.19,7.52 JP-UART.DTR
N$11
  Top 1.016: C16.2 73.1,5.46 ANT1.1
  Top 1.143: 72.85,6.35 arc-90 ANT1.1
N$13
  Top 0.254: OK1.2 55.97,10.25 R7.2
N$15
  Top 0.254: R3.1 45.91,21.78 OK2.2
N$17
  Top 0.254: OK3.2 R6.2
N$18
  Top 0.203: 74.49,39.73 74.12,39.36 74.12,39.1 73.62,38.6 73.61,38.6
N$20
  Top 0.203: U1_TQFP.20 79.33,44.41 78.74,43.82 78.59,43.82 ATMEGA328.20
  Top 0.254: U1_TQFP.20 80.61,45.63 C8.1
N$24
  Top 1.016: C19.2 78.32,7.51 78.44,7.51
  Top 1.27: J$1.SIG 78.44,7.51
N$25
  Top 0.406: 77.47,60.2 78.49,60.2
N$41
  Top 0.254: R10.1 79.74,34.77 80.78,34.77 LED1.A
NETDF
  Top 0.254: LMP2.6 22.86,30.91 C22.1 | 25.13,30.94 R8.1
  Top 0.406: C22.1 25.13,30.94 | LMP2.6 LMP2.7
NETDG
  Top 0.254: R2.1 22.57,47.53 C1.1 22.46,44.41 LMP8481.6 LMP8481.7
RESET  (via drill 0.5)  (2 unrouted)
  Top 0.203: U1_TQFP.29 72.81,44.41 73.41,43.82 73.56,43.82 ATMEGA328.29
  Top 0.254: R32.1 83.47,53.66 v83.72,53.5 83.97,53.25 85.22,52 92.47,52 93.72,50.75 93.72,46.16 ISP1.5 | U1_TQFP.29 71.57,45.6 v66.16,45.6 | v31.53,23.69 28.96,23.69 28.96,7.71 U$1.P$2 U$1.P$1 | v38.49,23.69 38.49,21.06 OK3.4
  Bottom 0.254: v31.53,23.69 v38.49,23.69 47.86,23.69 56.52,32.35 56.52,35.85 66.27,45.6 v66.16,45.6 63.51,45.6 63.51,53.5 v83.72,53.5
RESET-ISO
  Top 0.254: R6.1 35.97,7.47 C2.2
RX-ISO
  Top 0.254: OK2.4 43.33,9.91 44.45,9.91 44.45,7.52 JP-UART.RXI
TOLOAD1
  Top 0.406: X2.T 15.88,46.45 15.88,35.68 C6.1 21.12,37.58 LMP8481.1 19.32,37.58 PAD2.1
TOLOAD2
  Top 0.406: X3.T 18.03,18.09 | 18.03,18.09 19.41,18.09 | LMP2.1 20.21,18.09 19.56,18.09 19.41,18.09 | PAD4.1 17.95,19.95 18.03,18.09 | C23.1 19.41,18.09
TX-ISO
  Top 0.254: R7.1 47.18,10.25 JP-UART.TXO
VSEL
  Top 0.254: V-READING_SEL.2 41.21,33.4 C27.1 41.25,33.32 R11.2
(copper drawn outside any net)
  shapes: Top area x1

## Text on the board
bPlace: emonDC | wireless energy monitoring node | Technology that helps us live within ecological limits | Designed in | Designed in North Wales UK by Glyn Hudson & Trystan Lea | North Wales | Made in UK | Node: | OpenEnergyMonitor.org | Open-Hardware | Lead free PCB - RoHS components
tNames: D2 | D3 | AMP1 | 16MHz | AMP2 | RESET
tSilk: 5V | D9 | 2 / / 1 | emonDCduo | D8 | v1.0 Jan 2016 | based on emonTx / v3.4 by GH | Wireless Energy / Monitoring Node | RFM12B / RFM69CW | RST | Rx | Tx | 5V | GND | UART / FTDI
_tsilk: Designed in | North Wales | Made in UK
_bsilk: SMT V0.6 rev3 | emonTx | wireless energy monitoring node | SMT V0.6 rev3 | emonTx | SMT V0.6 rev3 | emonTx | Technology that helps us live within ecological limits | wireless energy monitoring node | wireless energy monitoring node | Designed in North Wales UK by Glyn Hudson & Trystan Lea | Technology that helps us live within ecological limits | Technology that helps us live within ecological limits | Designed in North Wales UK by Glyn Hudson & Trystan Lea | 165mm ant | 433Mhz | Designed in North Wales UK by Glyn Hudson & Trystan Lea | 165mm ant | 165mm ant | 433Mhz | 433Mhz | 868Mhz | 82mm ant | 82mm ant | 82mm ant | 868Mhz | 868Mhz | 78mm ant | 915Mhz | 78mm ant | 915Mhz | 78mm ant | 915Mhz | 165mm ant | 433Mhz | 82mm ant | 868Mhz | 78mm ant | 915Mhz